# Altium PCB Deneigus.PcbDoc
Units mil, origin at the board's own origin, x right, y up, seen from the top; angles counter-clockwise.
Board outline 5000 x 5000 mil, 4 copper layers (Top, Ground Plane, Power Plane, Bottom), stack 67.086 mil thick; 118 components, 116 nets, 503 pads, 0 vias.
Unrouted connection lines stored in the file: 188.
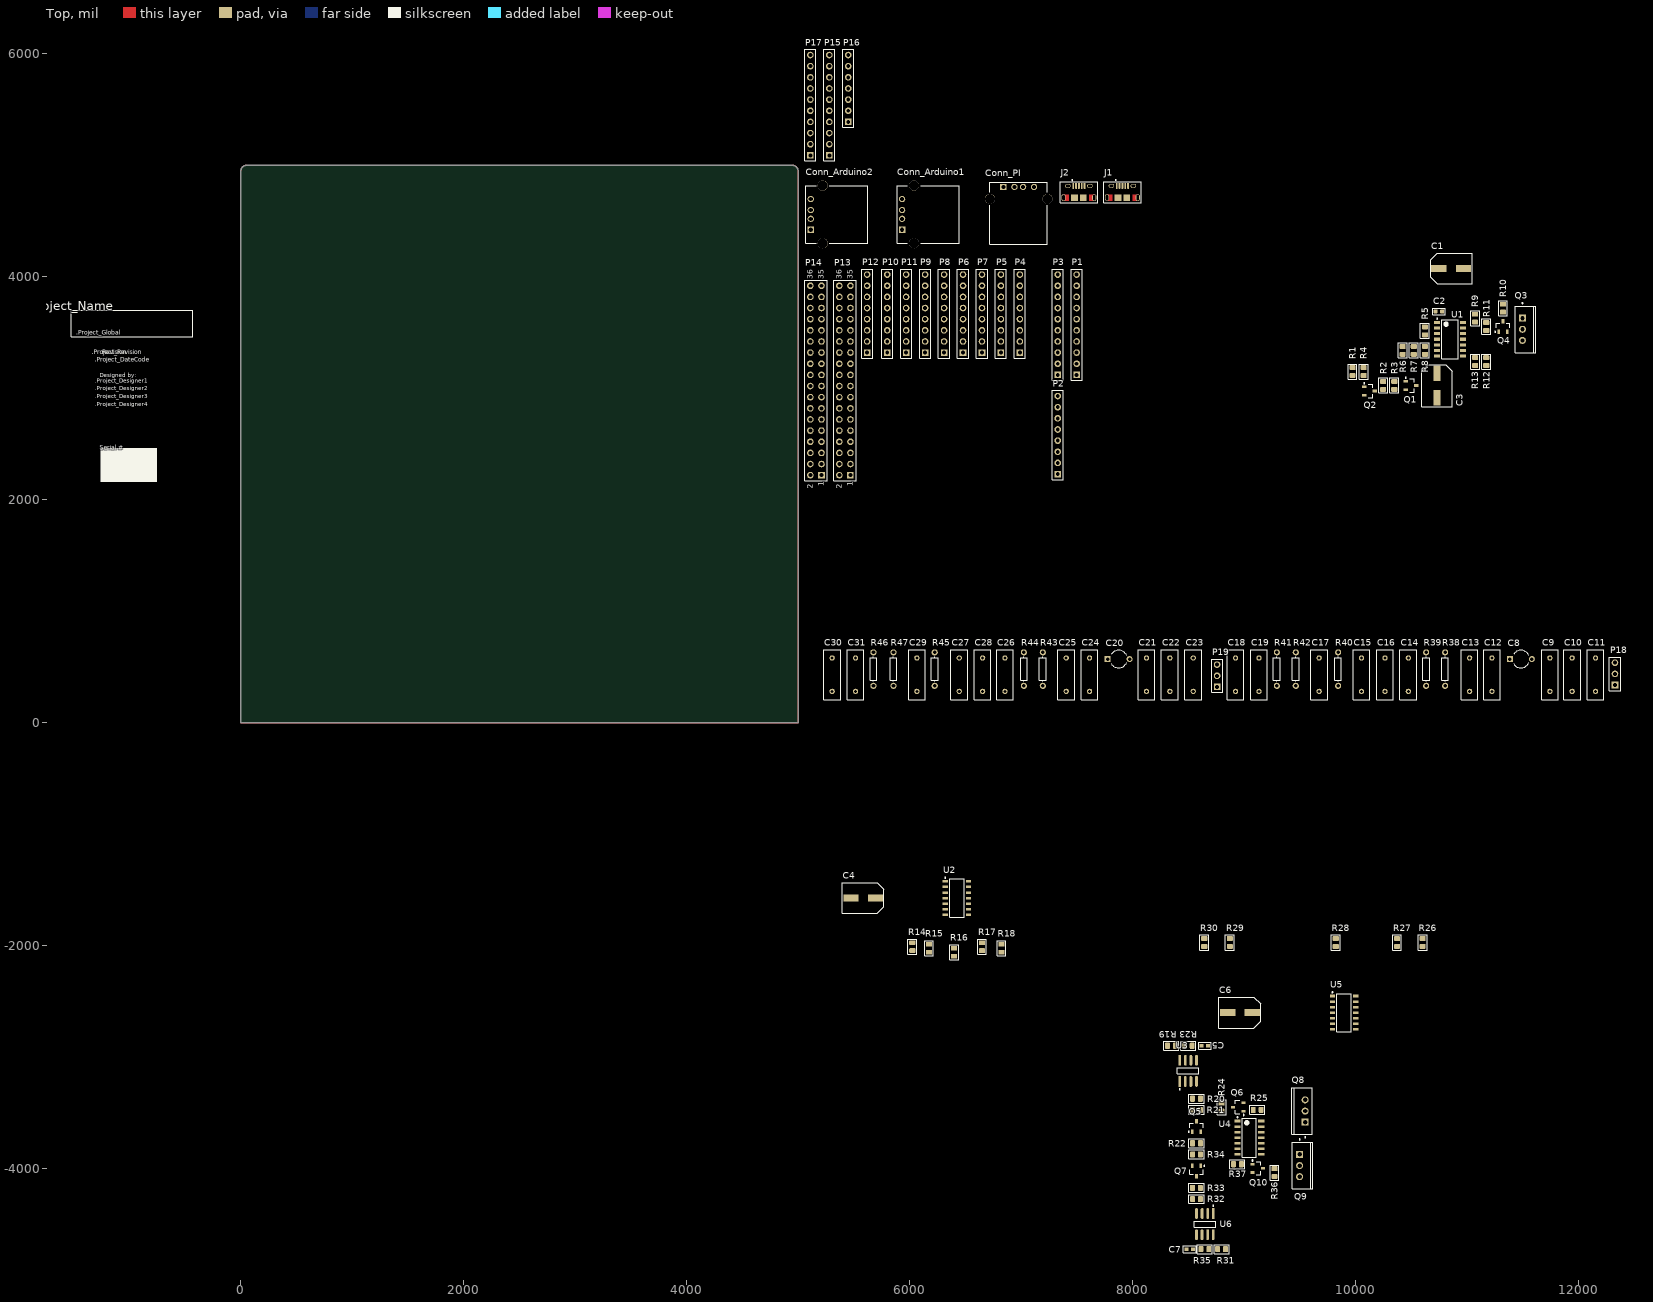
[diagram p0: Top view]
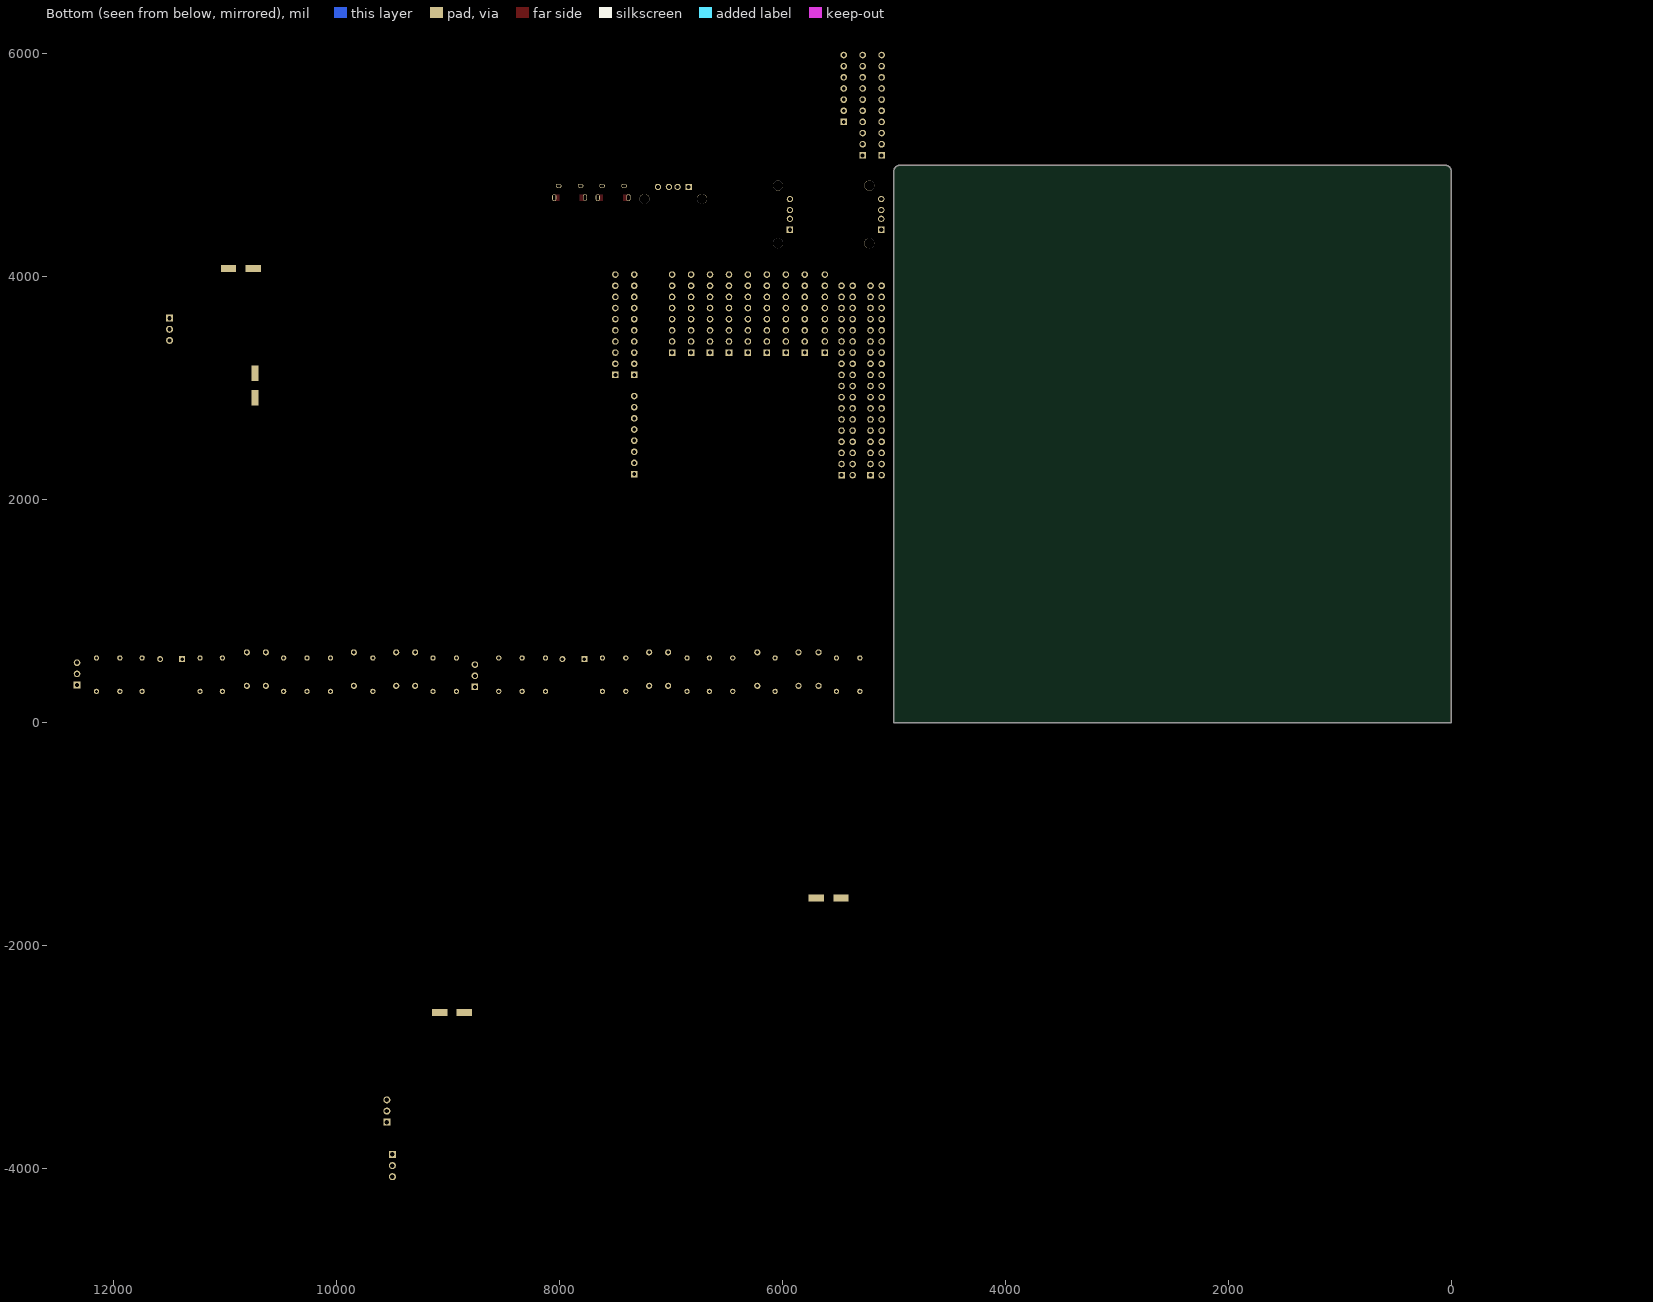
[diagram p1: Bottom view, seen from below]
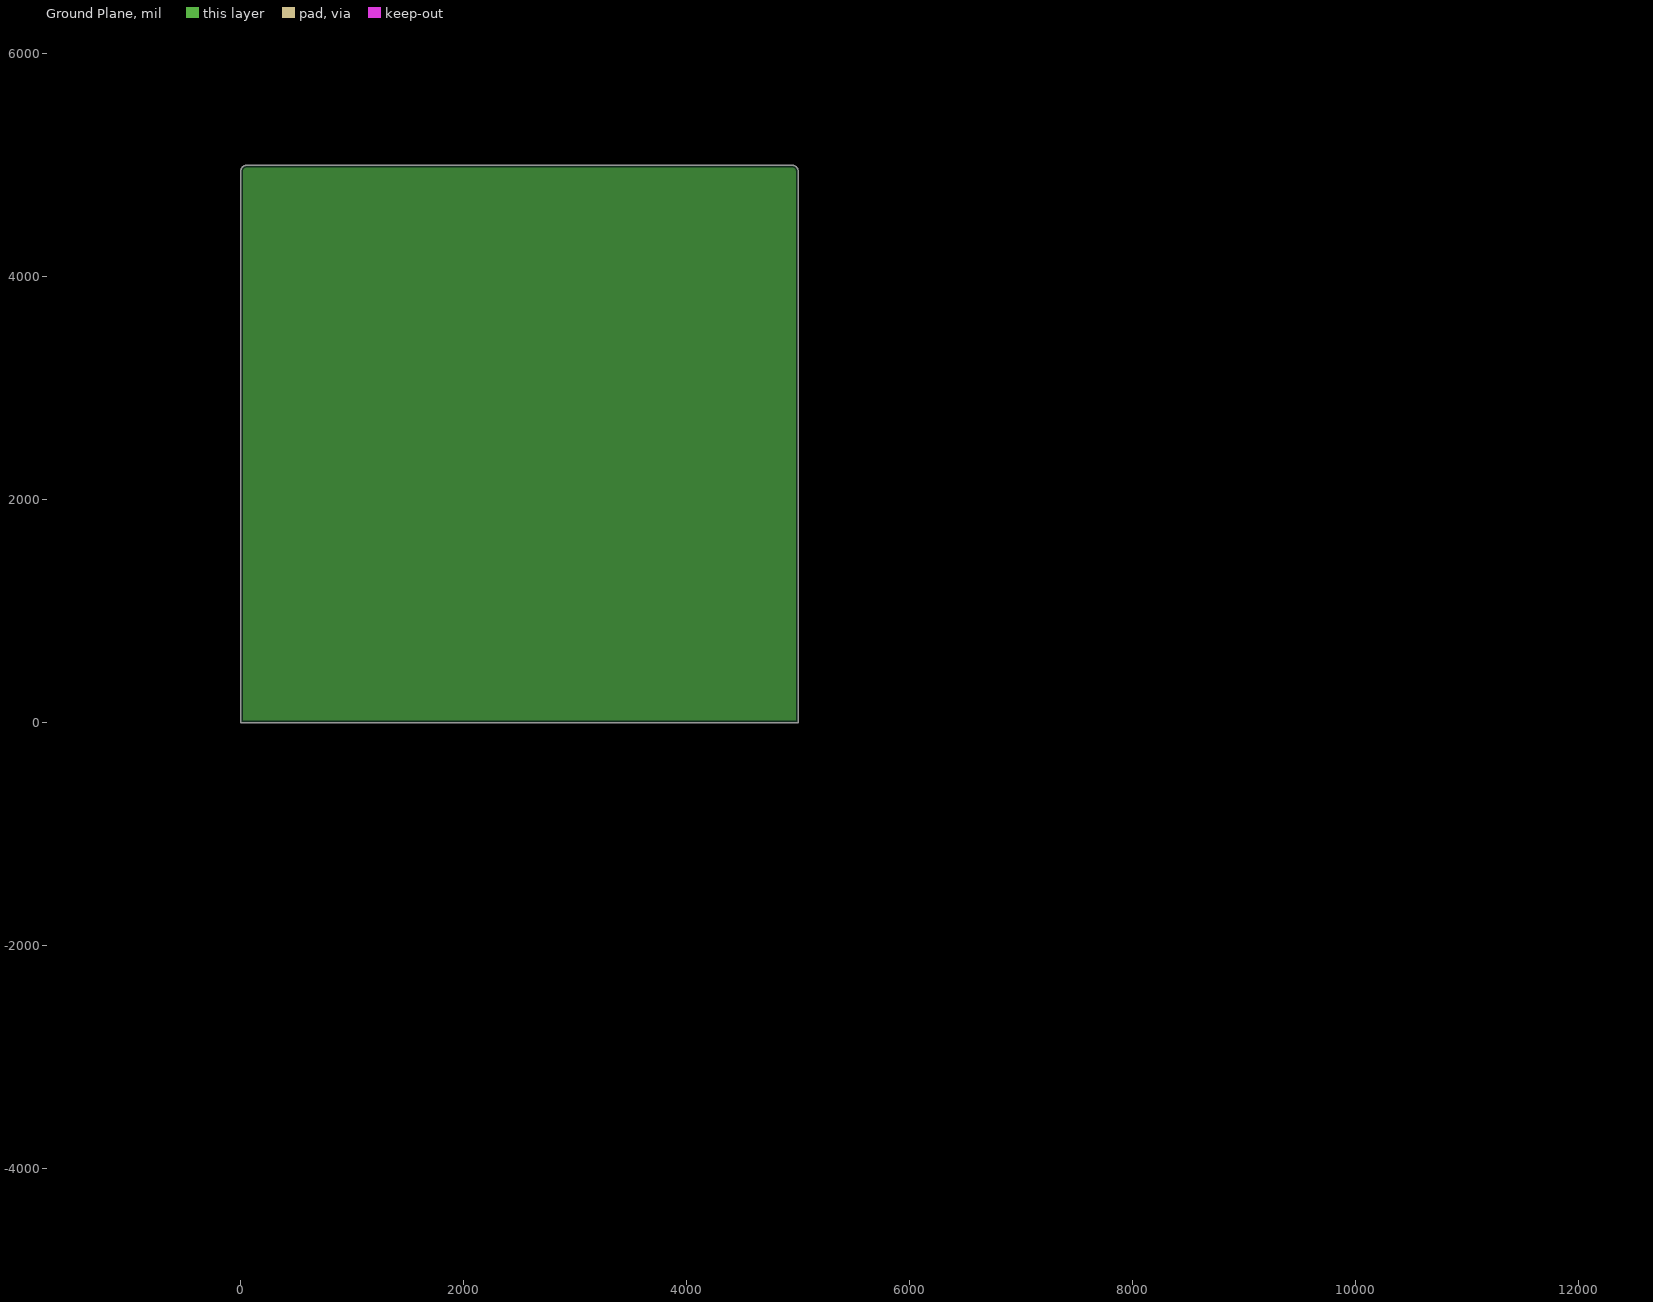
[diagram p2: Ground Plane, clearances drawn from the general rule]
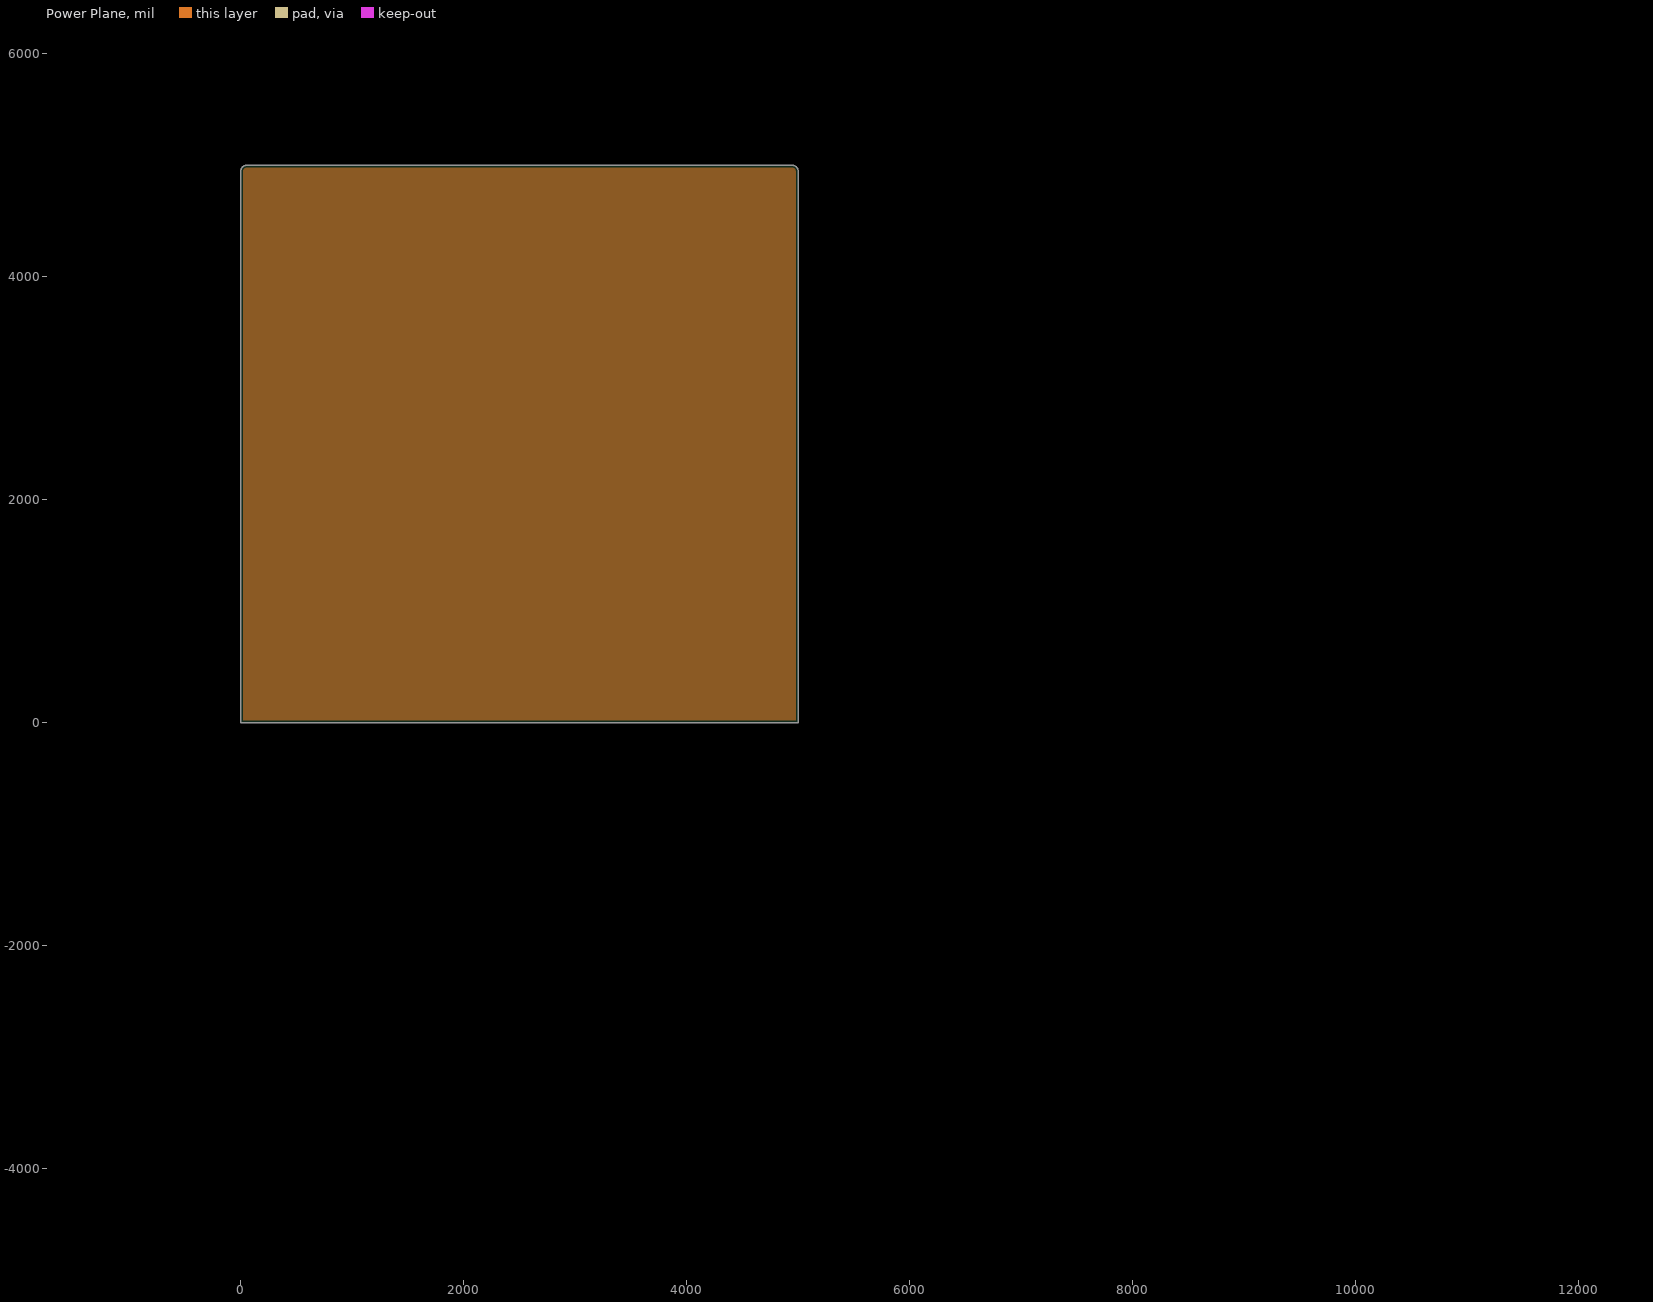
[diagram p3: Power Plane, clearances drawn from the general rule]

## Layer stack, top to bottom
Top Solder: solder mask 0.4, Solder Resist, Dk 3.5
Top: signal copper 1.378
Dielectric 1: prepreg 7.874, FR-4, Dk 4.2
Ground Plane: plane copper 0.669
Dielectric 3: core 47.244, Dk 4.2
Power Plane: plane copper 0.669
Dielectric 4: prepreg 7.874, Dk 4.2
Bottom: signal copper 1.378
Bottom Solder: solder mask 0.4, Solder Resist, Dk 3.5

## Board outline
0,0 5000,0 5000,4950 ccw(c4950,4950) 4950,5000 50,5000 ccw(c50,4950) 0,4950

## Design rules (kind name [scope] priority, off if disabled: settings)
Clearance [All] p1: gap=6 ignorepadtopadclearanceinfootprint=FALSE except(0: Arc-Hole Track-Hole SMDPad-Hole THPad-Hole Via-Hole Fill-Hole Poly-Hole Region-Hole Text-Hole)
ComponentClearance [All] p1: gap=4 collisioncheckmode=3 verticalgap=4 showdistances=FALSE
HoleSize [All] p1: absolutevalues=TRUE maxlimit=1000 minlimit=4 maxpercent=80.000 minpercent=20.000
HoleToHoleClearance [All] p1: gap=10 allowstackedmicrovias=FALSE
MinimumSolderMaskSliver [All] p1: minsoldermaskwidth=4
PlaneClearance [All] p1: clearance=6
PlaneConnect [All] p1: pad.planeconnectstyle=Relief pad.reliefexpansion=20 pad.reliefentries=4 pad.reliefconductorwidth=10 pad.reliefairgap=10 via.planeconnectstyle=Direct via.reliefexpansion=20 via.reliefentries=4 via.reliefconductorwidth=10 via.reliefairgap=10
PolygonConnect [All] p1: thpad.connectstyle=Relief thpad.reliefconductorwidth=10 thpad.reliefentries=4 thpad.polygonreliefangle="90 Angle" thpad.airgapwidth=10 smdpad.connectstyle=Direct smdpad.reliefconductorwidth=10 smdpad.reliefentries=4 smdpad.polygonreliefangle="90 Angle" smdpad.airgapwidth=10 via.connectstyle=Direct via.reliefconductorwidth=10 via.reliefentries=4 via.polygonreliefangle="90 Angle" via.airgapwidth=10
RoomDefinition Deneigus_Controle_Deplacement [InComponentClass('Deneigus_Controle_Deplacement')] p1: confinementstyle=ConfineIn formatcopy=TRUE lockcomponents=FALSE outline 4714.53,-5625 10894.53,-5625 10894.53,-875 4714.53,-875
RoomDefinition Deneigus_Servo [InComponentClass('Deneigus_Servo')] p2: confinementstyle=ConfineIn formatcopy=TRUE lockcomponents=FALSE outline 5215.97,190 12425.97,190 12425.97,770 5215.97,770
RoomDefinition Deneigus_Sensors [InComponentClass('Deneigus_Sensors')] p3: confinementstyle=ConfineIn formatcopy=TRUE lockcomponents=FALSE outline 5050,2080 7580,2080 7580,6150 5050,6150
RoomDefinition Deneigus_PI_Arduino [InComponentClass('Deneigus_PI_Arduino')] p4: confinementstyle=ConfineIn formatcopy=TRUE lockcomponents=FALSE outline 5050,2080 7580,2080 7580,6150 5050,6150
RoomDefinition Deneigus_Controle_Soufflante [InComponentClass('Deneigus_Controle_Soufflante')] p5: confinementstyle=ConfineIn formatcopy=TRUE lockcomponents=FALSE outline 9850,2700 11825,2700 11825,4400 9850,4400
RoutingVias [All] p1: holewidth=10 width=20 viastyle="Through Hole" minholewidth=10 minwidth=20 maxholewidth=10 maxwidth=20
SilkToSilkClearance [All] p1: silktosilkclearance=4
SilkToSolderMaskClearance [IsPad] p1: minsilkscreentomaskgap=2 clearancetoexposedcopper=FALSE
SolderMaskExpansion [All] p1: expansion=2 istentingtop=FALSE
Width [All] p1: maxlimit=1000 minlimit=4 preferedwidth=6
22 further rules are at their usual default settings.

## Classes and differential pairs
component class Deneigus_Servo: C8 C9 C10 C11 C12 C13 C14 C15 C16 C17 C18 C19 C20 C21 C22 C23 C24 C25 C26 C27 C28 C29 C30 C31 P18 P19 R38 R39 R40 R41 R42 R43 R44 R45 R46 R47 U?
component class Deneigus_Sensors: J? P15 P16 P17
component class Deneigus_POWER: Conn_Arduino1 Conn_Arduino2 Conn_PI J1 J2
component class Deneigus_PI_Arduino: J? P1 P2 P3 P4 P5 P6 P7 P8 P9 P10 P11 P12 P13 P14
component class Deneigus_Controle_Soufflante: C1 C2 C3 Q1 Q2 Q3 Q4 R1 R2 R3 R4 R5 R6 R7 R8 R9 R10 R11 R12 R13 U1
component class Deneigus_Controle_Deplacement: C4 C5 C6 C7 Q5 Q6 Q7 Q8 Q9 Q10 R14 R15 R16 R17 R18 R19 R20 R21 R22 R23 R24 R25 R26 R27 R28 R29 R30 R31 R32 R33 R34 R35 R36 R37 U2 U3 U5 U6

## Components (designator, comment, footprint, x,y, rotation, side; value= is the part's Value field where it differs from the comment)
C1 "CAP ALUM POLY 47UF 20% 16V SMD" 47uF 10970.47,4075 r180 top value=100µF
C2 "CAP - 0603" CAP_0603 10750,3689.5 r180 top value=100nF
C3 "CAP ALUM POLY 47UF 20% 16V SMD" 47uF 10733.86,2914.5 r90 top value=47µF
C4 "CAP ALUM POLY 47UF 20% 16V SMD" 47uF 5475,-1575 r0 top value=47µF
C5 "CAP - 0603" CAP_0603 8650,-2900 r180 top value=100nF
C6 "CAP ALUM POLY 47UF 20% 16V SMD" 47uF 8854.53,-2603.23 r0 top value=47µF
C7 "CAP - 0603" CAP_0603 8514.5,-4725 r0 top value=100nF
C8 "Cap2" CAPR5-4X5 11485.97,570 r0 top value=3300µF
C9 "Cap" RAD-0.3 11745.97,430 r90 top value=330µF
C10 "Cap" RAD-0.3 11945.97,430 r90 top value=?F
C11 "Cap" RAD-0.3 12155.97,430 r90 top value=?F
C12 "Cap" RAD-0.3 11225.97,430 r90 top value=330nF
C13 "Cap" RAD-0.3 11025.97,430 r90 top value=2.2µF
C14 "Cap" RAD-0.3 10475.97,430 r90 top value=2.2nF
C15 "Cap" RAD-0.3 10055.97,430 r90 top value=22nF
C16 "Cap" RAD-0.3 10265.97,430 r90 top value=22nF
C17 "Cap" RAD-0.3 9675.97,430 r90 top value=2.2µF
C18 "Cap" RAD-0.3 8925.97,430 r90 top value=2.2µF
C19 "Cap" RAD-0.3 9135.97,430 r90 top value=2.2µF
C20 "Cap2" CAPR5-4X5 7875.97,570 r0 top value=3300µF
C21 "Cap" RAD-0.3 8125.97,430 r90 top value=330µF
C22 "Cap" RAD-0.3 8335.97,430 r90 top value=?F
C23 "Cap" RAD-0.3 8545.97,430 r90 top value=?F
C24 "Cap" RAD-0.3 7615.97,430 r90 top value=330nF
C25 "Cap" RAD-0.3 7405.97,430 r90 top value=2.2µF
C26 "Cap" RAD-0.3 6855.97,430 r90 top value=2.2nF
C27 "Cap" RAD-0.3 6445.97,430 r90 top value=22nF
C28 "Cap" RAD-0.3 6655.97,430 r90 top value=22nF
C29 "Cap" RAD-0.3 6065.97,430 r90 top value=2.2µF
C30 "Cap" RAD-0.3 5305.97,430 r90 top value=2.2µF
C31 "Cap" RAD-0.3 5515.97,430 r90 top value=2.2µF
Conn_Arduino1 "USB-A1HSW6" OST_USB-A1HSW6 6190,4560 r90 top
Conn_Arduino2 "USB-A1HSW6" OST_USB-A1HSW6 5370,4560 r90 top
Conn_PI "USB-A1HSW6" OST_USB-A1HSW6 6980,4550 r0 top
J1 "10118194-0001LF" CON_USB_10118194-0001LF 7910,4710 r0 top value="USB - Micro B"
J2 "10118194-0001LF" CON_USB_10118194-0001LF 7520,4710 r0 top value="USB - Micro B"
P1 "Header 10" HDR1X10 7500,3120 r90 top
P2 "Header 8" HDR1X8 7330,2230 r90 top
P3 "Header 10" HDR1X10 7330,3120 r90 top
P4 "Header 8" HDR1X8 6990,3320 r90 top
P5 "Header 8" HDR1X8 6820,3320 r90 top
P6 "Header 8" HDR1X8 6480,3320 r90 top
P7 "Header 8" HDR1X8 6650,3320 r90 top
P8 "Header 8" HDR1X8 6310,3320 r90 top
P9 "Header 8" HDR1X8 6140,3320 r90 top
P10 "Header 8" HDR1X8 5800,3320 r90 top
P11 "Header 8" HDR1X8 5970,3320 r90 top
P12 "Header 8" HDR1X8 5620,3320 r90 top
P13 "Header 18X2" HDR2X18 5470,2220 r90 top
P14 "Header 18X2" HDR2X18 5210,2220 r90 top
P15 "Header 10" HDR1X10 5280,5090 r90 top
P16 "Header 7" HDR1X7 5450,5390 r90 top
P17 "Header 10" HDR1X10 5110,5090 r90 top
P18 "Header 3" HDR1X3 12330,337.26 r90 top
P19 "Header 3" HDR1X3 8760,320 r90 top
Q1 "TRANS PNP 40V 0.2A SOT23" SOT-23 10500,3025 r0 top
Q2 "TRANS NPN 40V 0.2A SOT23" SOT-23 10127.24,2975 r0 top
Q3 "IRF520NPBF" INTR-TO-220AB-3 11500,3529 r0 top
Q4 "TRANS NPN 40V 0.2A SOT23" SOT-23 11325,3554 r90 top
Q5 "TRANS NPN 40V 0.2A SOT23" SOT-23 8575,-3625 r90 top
Q6 "TRANS NPN 40V 0.2A SOT23" SOT-23 8950,-3450 r180 top
Q7 "TRANS NPN 40V 0.2A SOT23" SOT-23 8575,-4025 r270 top
Q8 "IRF520NPBF" INTR-TO-220AB-3 9550,-3485.5 r180 top
Q9 "IRF520NPBF" INTR-TO-220AB-3 9500,-3975 r0 top
Q10 "TRANS NPN 40V 0.2A SOT23" SOT-23 9125,-4000 r0 top
R1 "Res1" RES_0805 9975,3150 r90 top value=10K
R2 "Res1" RES_0805 10250,3025 r270 top value=1K
R3 "Res1" RES_0805 10350,3025 r90 top value=1K
R4 "Res1" RES_0805 10075,3150 r270 top value=1K
R5 "Res1" RES_0805 10625,3514.5 r270 top value=1K
R6 "Res1" RES_0805 10425,3339.5 r270 top value=15K
R7 "Res1" RES_0805 10525,3339.5 r270 top value=10K
R8 "Res1" RES_0805 10625,3339.5 r90 top value=10K
R9 "Res1" RES_0805 11075,3629 r90 top value=1K
R10 "Res1" RES_0805 11325,3718.5 r90 top value=10K
R11 "Res1" RES_0805 11175,3554 r270 top value=10K
R12 "Res1" RES_0805 11175,3239.5 r270 top value=30k
R13 "Res1" RES_0805 11075,3239.5 r90 top value=10k
R14 "Res1" RES_0805 6025,-2010.5 r90 top value=15K
R15 "Res1" RES_0805 6175,-2025 r90 top value=10K
R16 "Res1" RES_0805 6400,-2060.5 r90 top value=15K
R17 "Res1" RES_0805 6650,-2010.5 r90 top value=9K
R18 "Res1" RES_0805 6825,-2025 r90 top value=1K
R19 "Res1" RES_0805 8350,-2900 r180 top value=3K
R20 "Res1" RES_0805 8575,-3375 r0 top value=1k
R21 "Res1" RES_0805 8575,-3475 r0 top value=1k
R22 "Res1" RES_0805 8575,-3775 r0 top value=1k
R23 "Res1" RES_0805 8500,-2900 r180 top value=3K
R24 "Res1" RES_0805 8800,-3450 r90 top value=1k
R25 "Res1" RES_0805 9119.49,-3475 r180 top value=220
R26 "Res1" RES_0805 10604.53,-1973.23 r90 top value=10K
R27 "Res1" RES_0805 10374.53,-1973.23 r90 top value=15K
R28 "Res1" RES_0805 9824.53,-1973.23 r90 top value=15K
R29 "Res1" RES_0805 8874.53,-1973.23 r90 top value=9K
R30 "Res1" RES_0805 8644.53,-1973.23 r90 top value=1K
R31 "Res1" RES_0805 8800,-4725 r0 top value=3K
R32 "Res1" RES_0805 8575,-4275 r180 top value=1k
R33 "Res1" RES_0805 8575,-4175 r180 top value=1k
R34 "Res1" RES_0805 8575,-3875 r0 top value=1k
R35 "Res1" RES_0805 8650,-4725 r0 top value=3K
R36 "Res1" RES_0805 9275,-4037.4 r270 top value=1k
R37 "Res1" RES_0805 8942.72,-3962.6 r0 top value=220
R38 "Res1" AXIAL-0.3 10805.97,480 r90 top value=16k
R39 "Res1" AXIAL-0.3 10635.97,480 r90 top value=4.5k
R40 "Res1" AXIAL-0.3 9845.97,480 r90 top value=30k
R41 "Res1" AXIAL-0.3 9295.97,480 r90 top value=15k
R42 "Res1" AXIAL-0.3 9465.97,480 r90 top value=10k
R43 "Res1" AXIAL-0.3 7195.97,480 r90 top value=16k
R44 "Res1" AXIAL-0.3 7025.97,480 r90 top value=1.7k
R45 "Res1" AXIAL-0.3 6225.97,480 r90 top value=30k
R46 "Res1" AXIAL-0.3 5675.97,480 r90 top value=15k
R47 "Res1" AXIAL-0.3 5855.97,480 r90 top value=10k
U1 "LM339" SOP14 10850,3439.5 r0 top
U2 "LM324DR2G" ONSC-SOIC-14-751A-03_V 6425,-1575 r0 top
U3 "NE555DR" FP-D0008A-IPC_A 8500,-3125 r90 top
U4 "IC FF JK TYPE DUAL 1BIT 14SOIC" SOIC127P600X175-14N 9050,-3725 r0 top
U5 "LM324DR2G" ONSC-SOIC-14-751A-03_V 9899.8,-2603.23 r0 top
U6 "NE555DR" FP-D0008A-IPC_A 8650,-4500 r270 top

## Footprints (in the part's own frame and the unit in brackets; to place one, negate y for a bottom-side part, rotate by r counter-clockwise, add the part's x,y. Pads: shape width x height; smd on the part's side, far side on the other; paste and mask are expansions set on the pad)
47uF [mm] "CAP ALUM POLY 47UF 20% 16V SMD"
  rect 3.5x1.6 all layers, no hole: 1(5.6,0) 2(0,0)
  silkscreen extent -2,-3.5 7.5,3.5
AXIAL-0.3 [mm] "Axial Device, Thru-Hole; 2 Leads; 0.3 in Pin Spacing"
  round 1.4 hole 0.85: 1(-3.81,0) 2(3.81,0)
  silkscreen extent -2.77,-0.76 2.77,0.76
CAP_0603 [mil]
  rrect35% 35x34 smd: 1(-29.5,0) 2(29.5,0)
  silkscreen extent -57,-30 57,30, body extent -32,-16 31,16, height 35
CAPR5-4X5 [mm] "Capacitor; 2 Leads"
  rect 1.35x1.35 hole 0.8: 1(-2.5,0)
  round 1.35 hole 0.8: 2(2.5,0)
  silkscreen extent -1.69,-2 1.82,2
CON_USB_10118194-0001LF [mm]
  rrect50% 0.4x1.35 smd paste+0 mask+0.05: 1(-1.3,2.7) 2(-0.65,2.7) 3(0,2.7) 4(0.65,2.7) 5(1.3,2.7)
  rrect100% 1.25x0.95 hole 0.55 slot 0.85 at 0 deg mask+0.05: 6(2.5,2.7) 11(-2.5,2.7)
  rrect100% 0.95x1.55 hole 0.5 slot 1.15 at 90 deg mask+0.05: 7(3.5,0) 10(-3.5,0)
  rect 1.5x1.55 smd paste+0 mask+0.05: 8(1,0) 9(-1,0)
  Top region: 2.3,-0.775 3.5,-0.775 3.5,0.775 2.3,0.775
  Top region: -2.3,0.775 -3.5,0.775 -3.5,-0.775 -2.3,-0.775
  silkscreen extent -4.3,-1.2 4.3,4.11, body extent -4.03,-2.69 4.02,2.89, height 2.72
FP-D0008A-IPC_A [mil]
  rect 97.21x24.49 smd paste+0 mask+0: 1(-95.02,75)
  rrect100% 97.21x24.49 smd paste+0 mask+0: 2(-95.02,25) 3(-95.02,-25) 4(-95.02,-75) 5(95.02,-75) 6(95.02,-25) 7(95.02,25) 8(95.02,75)
  silkscreen extent -170,-97 27,97, body extent -163,-116 163,116, height 10
HDR1X3 [mm] "Connector; Header; 3 Position"
  rect 1.5x1.5 hole 0.9: 1(0,0)
  round 1.5 hole 0.9: 2(2.54,0) 3(5.08,0)
  silkscreen extent -1.27,-1.27 6.35,1.27
HDR1X7 [mm] "Connector; Header; 7 Position"
  rect 1.5x1.5 hole 0.9: 1(0,0)
  round 1.5 hole 0.9: 2(2.54,0) 3(5.08,0) 4(7.62,0) 5(10.16,0) 6(12.7,0) 7(15.24,0)
  silkscreen extent -1.27,-1.27 16.51,1.27
HDR1X8 [mm] "Connector; Header; 8 Position"
  rect 1.5x1.5 hole 0.9: 1(0,0)
  round 1.5 hole 0.9: 2(2.54,0) 3(5.08,0) 4(7.62,0) 5(10.16,0) 6(12.7,0) 7(15.24,0) 8(17.78,0)
  silkscreen extent -1.27,-1.27 19.05,1.27
HDR1X10 [mm] "Connector; Header; 10 Position"
  rect 1.5x1.5 hole 0.9: 1(0,0)
  round 1.5 hole 0.9: 2(2.54,0) 3(5.08,0) 4(7.62,0) 5(10.16,0) 6(12.7,0) 7(15.24,0) 8(17.78,0) 9(20.32,0) 10(22.86,0)
  silkscreen extent -1.27,-1.27 24.13,1.27
HDR2X18 [mm] "Connector; Header; 18x2 Position"
  rect 1.5x1.5 hole 0.9: 1(0,0)
  round 1.5 hole 0.9: 2(0,2.54) 3(2.54,0) 4(2.54,2.54) 5(5.08,0) 6(5.08,2.54) 7(7.62,0) 8(7.62,2.54) 9(10.16,0) 10(10.16,2.54) 11(12.7,0) 12(12.7,2.54) 13(15.24,0) 14(15.24,2.54) 15(17.78,0) 16(17.78,2.54) 17(20.32,0) 18(20.32,2.54) 19(22.86,0) 20(22.86,2.54) 21(25.4,0) 22(25.4,2.54) 23(27.94,0) 24(27.94,2.54) 25(30.48,0) 26(30.48,2.54) 27(33.02,0) 28(33.02,2.54) 29(35.56,0) 30(35.56,2.54) 31(38.1,0) 32(38.1,2.54) 33(40.64,0) 34(40.64,2.54) 35(43.18,0) 36(43.18,2.54)
  silkscreen extent -1.27,-1.27 44.45,3.81
INTR-TO-220AB-3 [mm] "FM, 3-Leads, Body 10.55x4.7mm, Pitch 2.54mm"
  rect 1.6x1.6 hole 1: 1(0,2.54)
  round 1.6 hole 1: 2(0,0) 3(0,-2.54)
  silkscreen extent -1.67,-5.3 3.03,6.07, body extent -1.67,-5.28 3.03,5.28, height 19.3
ONSC-SOIC-14-751A-03_V [mm] "SOIC, 14-Leads, Body 8.75x4mm, Pitch 1.27mm"
  rect 1.18x0.58 smd: 1(-2.66,3.81) 2(-2.66,2.54) 3(-2.66,1.27) 4(-2.66,0) 5(-2.66,-1.27) 6(-2.66,-2.54) 7(-2.66,-3.81) 8(2.66,-3.81) 9(2.66,-2.54) 10(2.66,-1.27) 11(2.66,0) 12(2.66,1.27) 13(2.66,2.54) 14(2.66,3.81)
  silkscreen extent -2.78,-4.38 1.67,4.77, body extent -2,-4.38 2,4.38, height 1.75
OST_USB-A1HSW6 [mm]
  rect 1.428x1.428 hole 0.92: 1(-3.5,6.51)
  round 1.428 hole 0.92: 2(-1,6.51) 3(1,6.51) 4(3.5,6.51)
  round 2.3 hole 2.3 unplated: ""(-6.57,3.8) ""(6.57,3.8)
  silkscreen extent -6.55,-6.5 6.55,7.6
RAD-0.3 [mm] "Radial Cap, Thru-Hole; 2 Leads; 0.3 in Pin Spacing"
  round 1.2 hole 0.7: 1(-3.81,0) 2(3.81,0)
  silkscreen extent -5.71,-1.91 5.71,1.91
RES_0805 [mil]
  rrect37% 43x55 smd: 1(-35.5,0) 2(35.5,0)
  silkscreen extent -68,-40 68,40, body extent -45,-27 45,27, height 30
SOIC127P600X175-14N [mm] "SOIC, 14-Leads, Body 8.65x3.90mm, Pitch 1.27mm, IPC Medium Density"
  rect 1.45x0.6 smd: 1(-2.725,3.81) 2(-2.725,2.54) 3(-2.725,1.27) 4(-2.725,0) 5(-2.725,-1.27) 6(-2.725,-2.54) 7(-2.725,-3.81) 8(2.725,-3.81) 9(2.725,-2.54) 10(2.725,-1.27) 11(2.725,0) 12(2.725,1.27) 13(2.725,2.54) 14(2.725,3.81)
  silkscreen extent -2.85,-4.4 1.6,4.78, body extent -3,-4.4 3,4.4, height 1.75
SOP14 [mm] "SOP14 pour LM339"
  rect 1.3x0.7 smd: 1(-2.95,3.81) 2(-2.95,2.54) 3(-2.95,1.27) 4(-2.95,0) 5(-2.95,-1.27) 6(-2.95,-2.54) 7(-2.95,-3.81) 8(2.95,-3.81) 9(2.95,-2.54) 10(2.95,-1.27) 11(2.95,0) 12(2.95,1.27) 13(2.95,2.54) 14(2.95,3.81)
  silkscreen extent -3.07,-4.45 1.9,4.83, body extent -3.1,-4.45 3.1,4.45, height 1.5
SOT-23 [mm] "SOT23, 3-Leads, Body 2.90x2.45mm, Pitch 0.95mm, IPC Medium Density"
  rect 1x0.6 smd: 1(-1.2,0.95) 2(-1.2,-0.95) 3(1.2,0)
  silkscreen extent -1.32,-1.5 0.7,1.92, body extent -0.7,-1.5 0.7,1.5, height 1.1

## Part data
C1: library part "47µF SMD", Mfg Part Number=875105344010, Supplier Part Number 1=732-6425-2-ND, HelpURL=https://www.we-online.de/katalog/datasheet/875105344010.pdf, Mfg="Würth Elektronik", Supplier 1=Digikey
C2 C5 C7: Package=0603, Voltage=50V, CreatedBy="Jonathan Bouchard", Precision=10%
C3 C4 C6: library part "47µF SMD", Mfg Part Number=875105344006, Supplier Part Number 1=732-6421-2-ND, HelpURL=https://www.we-online.de/katalog/datasheet/875105344006.pdf, Mfg="Würth Elektronik", Supplier 1=Digikey
C8 C9 C10 C11 C12 C13 C14 C15 C16 C17 C18 C19 C20 C21 C22 C23 C24 C25 C26 C27 C28 C29 C30 C31: "Capacitor", Publisher="Altium Limited"
  C8 C20: PackageDescription="Capacitor; 2 Leads", PackageReference=CAPR5-4X5, Published=23-Sep-2002
  C9 C10 C11 C12 C13 C14 C15 C16 C17 C18 C19 C21 C22 C23 C24 C25 C26 C27 C28 C29 C30 C31: LatestRevisionDate=17-Jul-2002, LatestRevisionNote="Re-released for DXP Platform.", PackageDescription="Radial Cap, Thru-Hole; 2 Leads; 0.3 in Pin Spacing", PackageReference=RAD-0.3, Published=8-Jun-2000
Conn_Arduino1 Conn_Arduino2 Conn_PI: "USB-A _USB TYPE-A_  Receptacle Connector 4 Position Through Hole, Right Angle", Package=None, Availability=Unavailable, MF="On Shore", MP=USB-A1HSW6, Price=None, SnapEDA_Link=https://www.snapeda.com/parts/USB-A1HSW6/On%20Shore%20Technology%20Inc./view-part/13110/?ref=snap
J1 J2: library part CON_USB_10118194-0001LF, "CON - USB MICRO B RECPT SMT R/A - 4PIN", Current Rating=1.8A, Manufacturer #1="Amphenol FCI", Package=5-SMD, Supplier Part Number 1=609-4618-1-ND, Temperature="-30°C ~ 80°C", Voltage Rating=100VAC, Assembly Type=SMD, CreatedBy/Date="Arnaud Samson - 09/07/18", Cryo=UNKNOWN, GRAMS Lib Spec=2.8, HelpURL=https://cdn.amphenol-icc.com/media/wysiwyg/files/drawing/10118194.pdf, Magnetic Material=YES, Part Number #1=10118194-0001LF, Polarized=YES, Supplier 1=Digi-Key, VerifiedBy="Jonathan Bouchard 2018-07-12"
P1 P3 P15 P17: "Header, 10-Pin", LatestRevisionDate=17-Jul-2002, LatestRevisionNote="Re-released for DXP Platform.", Publisher="Altium Limited"
P2 P4 P5 P6 P7 P8 P9 P10 P11 P12: "Header, 8-Pin", LatestRevisionDate=17-Jul-2002, LatestRevisionNote="Re-released for DXP Platform.", Publisher="Altium Limited"
P13 P14: "Header, 18-Pin, Dual row", LatestRevisionDate=17-Jul-2002, LatestRevisionNote="Re-released for DXP Platform.", Publisher="Altium Limited"
P16: "Header, 7-Pin", LatestRevisionDate=17-Jul-2002, LatestRevisionNote="Re-released for DXP Platform.", Publisher="Altium Limited"
P18 P19: "Header, 3-Pin", LatestRevisionDate=17-Jul-2002, LatestRevisionNote="Re-released for DXP Platform.", Publisher="Altium Limited"
Q1: library part "PNP 3906 SMD", "Trans GP BJT PNP 40V 0.2A 3-Pin SOT-23 T/R", Case/Package=SOT-23, Collector Base Voltage (VCBO)=40V, Collector Emitter Saturation Voltage=-250mV, Collector-emitter Voltage-Max=400mV, Current Rating=-2A, Emitter Base Voltage (VEBO)=5V, Frequency=250MHz, Manufacturer=MCC, Manufacturer Part Number=MMBT3906-TP, Max Collector Current=200mA, Max Operating Temperature=150°C, Max Power Dissipation=300mW, Min Operating Temperature=-55°C, Package Quantity=1, Supplier Part Number 1=MMBT3906-TPCT-ND, Voltage Rating (DC)=-40V, Category=BJTs, Collector Emitter Breakdown Voltage=40V, Collector Emitter Voltage (VCEO)=40V, ComponentLink1Description=https://datasheet.ciiva.com/6362/mmbt3906sot-23-6362513.pdf?src-supplier=Digi-Key, ComponentLink1URL=https://datasheet.ciiva.com/6362/mmbt3906sot-23-6362513.pdf?src-supplier=Digi-Key, ComponentLink2Description=https://datasheet.ciiva.com/15200/getdatasheetpartid-321202-15200524.pdf?src-supplier=Verical, ComponentLink2URL=https://datasheet.ciiva.com/15200/getdatasheetpartid-321202-15200524.pdf?src-supplier=Verical, Element Configuration=Single, Gain Bandwidth Product=250MHz, Height=1.12mm, hFE Min=60, Lead Free="Lead Free", Length=3.04mm, Max Breakdown Voltage=40V, Max Frequency=250MHz, Mount="Surface Mount", Number of Elements=1, Number of Pins=3, Packaging="Tape and Reel", Polarity=PNP, Power Dissipation=300mW, Pricing 1="1=0.14000, 10=0.09700, 25=0.09320, 100=0.05250, 500=0.04122, 1000=0.02862 (USD)", Radiation Hardening=No, RoHS=Yes, Series=-, Stock 1=96763, Supplier 1=Digi-Key, Transition Frequency=250MHz, Width=1.4mm
Q2 Q4 Q5 Q6 Q7 Q10: library part "NPN 3904 SMD", "Transistor: 200mA 200mW NPN General-Purpose Amplifier, SOT-23, 7IN. Reel", Case/Package=SOT-23, Collector Base Voltage (VCBO)=60V, Collector Emitter Breakdown Voltage=40V, Collector Emitter Saturation Voltage=300mV, Current Rating=100mA, Emitter Base Voltage (VEBO)=6V, Frequency=300MHz, Manufacturer=MCC, Manufacturer Part Number=MMBT3904-TP, Max Collector Current=200mA, Max Operating Temperature=150°C, Max Power Dissipation=350mW, Min Operating Temperature=-55°C, Package Quantity=1, Category=BJTs, Collector Emitter Voltage (VCEO)=40V, Collector-emitter Voltage-Max=300mV, ComponentLink1Description=https://datasheet.ciiva.com/972/mmbt3904sot-23-972515.pdf?src-supplier=Digi-Key, ComponentLink1URL=https://datasheet.ciiva.com/972/mmbt3904sot-23-972515.pdf?src-supplier=Digi-Key, ComponentLink2Description=https://datasheet.ciiva.com/16291/mmbt3904sot-23-37005-16291911.pdf?src-supplier=Mouser, ComponentLink2URL=https://datasheet.ciiva.com/16291/mmbt3904sot-23-37005-16291911.pdf?src-supplier=Mouser, ComponentLink3Description=https://datasheet.ciiva.com/15139/getdatasheetpartid-251950-15139820.pdf?src-supplier=Verical, ComponentLink3URL=https://datasheet.ciiva.com/15139/getdatasheetpartid-251950-15139820.pdf?src-supplier=Verical, ComponentLink4Description=https://datasheet.ciiva.com/972/mmbt3904sot-23-972516.pdf?src-supplier=Digi-Key, ComponentLink4URL=https://datasheet.ciiva.com/972/mmbt3904sot-23-972516.pdf?src-supplier=Digi-Key, ComponentLink5Description=https://datasheet.ciiva.com/16742/mmbt3904tsot-523-16742101.pdf?src-supplier=Future+Electronics, ComponentLink5URL=https://datasheet.ciiva.com/16742/mmbt3904tsot-523-16742101.pdf?src-supplier=Future+Electronics, ComponentLink6Description=https://datasheet.ciiva.com/14546/70055699-14546053.pdf?src-supplier=Allied+Electronics, ComponentLink6URL=https://datasheet.ciiva.com/14546/70055699-14546053.pdf?src-supplier=Allied+Electronics, Element Configuration=Single, Gain Bandwidth Product=300MHz, Height=1.12mm, hFE Min=40, Lead Free="Lead Free", Length=3.04mm, Max Breakdown Voltage=40V, Max Frequency=300MHz, Mount="Surface Mount", Number of Elements=1, Number of Pins=3, Packaging="Tape and Reel", Polarity=NPN, Power Dissipation=350mW, Pricing 1="1=0.10000, 10=0.08100, 25=0.07680, 100=0.04400, 500=0.02706, 1000=0.01844 (USD)", Radiation Hardening=No, RoHS=Yes, RoHS Compliant=Yes, Series=-, Stock 1=949449, Supplier 1=Digi-Key, Transition Frequency=300MHz, Voltage Rating (DC)=40V, Width=1.4mm
Q3: library part CMP-013-00017-4, "HEXFET(R) Power MOSFET, 100 V, 9.7 A, 0.2 Ohm, -55 to 175 degC, 3-Pin FM (TO-220AB), RoHS, Tube", Case/Package=TO-220-3, Continuous Drain Current (ID)=202A, Current Rating=162A, Drain to Source Breakdown Voltage=40V, Drain to Source Resistance=4mR, Gate to Source Voltage (Vgs)=20V, Input Capacitance=330pF, Manufacturer="International Rectifier", Manufacturer Part Number=IRF1404PBF, Max Operating Temperature=175°C, Max Power Dissipation=333W, Min Operating Temperature=-55°C, Nominal Dual Supply Voltage=100V, Package Description="3-Pin Flange Mount, Body 4.445 x 10.415 mm, Pitch 2.54 mm", Package Quantity=50, Package Reference=TO-220AB, Power=48W, Supplier Part Number 1=63J7187, Threshold Voltage=4V, Category=MOSFETs, ComponentLink1Description=https://datasheet.ciiva.com/7935/irf1404-7935436.pdf?src-supplier=Element14, ComponentLink1URL=https://datasheet.ciiva.com/7935/irf1404-7935436.pdf?src-supplier=Element14, ComponentLink2Description=https://datasheet.ciiva.com/19479/1559551-19479743.pdf?src-supplier=Jameco, ComponentLink2URL=https://datasheet.ciiva.com/19479/1559551-19479743.pdf?src-supplier=Jameco, ComponentLink3Description=https://datasheet.ciiva.com/17323/irf1404pbf-17323123.pdf?src-supplier=Avnet+Europe, ComponentLink3URL=https://datasheet.ciiva.com/17323/irf1404pbf-17323123.pdf?src-supplier=Avnet+Europe, ComponentLink4Description=https://datasheet.ciiva.com/939/irf1404pbf-939787.pdf?src-supplier=Digi-Key, ComponentLink4URL=https://datasheet.ciiva.com/939/irf1404pbf-939787.pdf?src-supplier=Digi-Key, ComponentLink5Description=https://datasheet.ciiva.com/16378/irf1404pbf-16378907.pdf?src-supplier=Future+Electronics, ComponentLink5URL=https://datasheet.ciiva.com/16378/irf1404pbf-16378907.pdf?src-supplier=Future+Electronics, Datasheet URL=http://www.infineon.com/dgdl/irf520npbf.pdf?fileId=5546d462533600a4015355e340711985, Datasheet Version=Nov-03, Drain to Source Voltage (Vdss)=40V, Drain-source On Resistance-Max=4mR, Dual Supply Voltage=40V, Element Configuration=Single, Elements=1, Fall Time=33ns, Height=8.77mm, Lead Free="Lead Free", Lead Pitch=2.54mm, Length=10.67mm, Mount="Through Hole", Mounting Technology=TH, Nominal Vgs=4V, Number of Elements=1, Number of Pins=3, On-State Resistance=4mR, Packaging=Rail/Tube, Pins=3, Power Dissipation=333W, Pricing 1="1=1.79000, 10=1.54000, 100=1.26000, 500=1.12000, 1000=0.96000 (USD)", Radiation Hardening=No, Rds On Max=200mohm, REACH SVHC="No SVHC", Recovery Time=117ns, Rise Time=190ns, RoHS=Yes, RoHS Compliant=True, Series=HEXFET®, Stock 1=216, Supplier 1=Digikey, Termination="Through Hole", Turn-Off Delay Time=46ns, Turn-On Delay Time=17ns, Typical Rise Time=23ns, Voltage Rating (DC)=40V, Width=4.83mm
Q8 Q9: library part CMP-013-00017-4, "HEXFET(R) Power MOSFET, 100 V, 9.7 A, 0.2 Ohm, -55 to 175 degC, 3-Pin FM (TO-220AB), RoHS, Tube", Case/Package=TO-220-3, Input Capacitance=330pF, Manufacturer="International Rectifier", Max Operating Temperature=175°C, Min Operating Temperature=-55°C, Nominal Dual Supply Voltage=100V, Package Description="3-Pin Flange Mount, Body 4.445 x 10.415 mm, Pitch 2.54 mm", Package Quantity=50, Package Reference=TO-220AB, Power=48W, Datasheet URL=http://www.infineon.com/dgdl/irf520npbf.pdf?fileId=5546d462533600a4015355e340711985, Datasheet Version=Nov-03, Elements=1, Mounting Technology=TH, Nominal Vgs=4V, Packaging=Rail/Tube, Pins=3, Rds On Max=200mohm, RoHS Compliant=True, Typical Rise Time=23ns
R1 R2 R3 R4 R5 R6 R7 R8 R9 R10 R11 R12 R13 R14 R15 R16 R17 R18 R19 R20 R21 R22 R23 R24 R25 R26 R27 R28 R29 R30 R31 R32 R33 R34 R35 R36 R37 R38 R39 R40 R41 R42 R43 R44 R45 R46 R47: "Resistor", LatestRevisionDate=17-Jul-2002, LatestRevisionNote="Re-released for DXP Platform.", PackageDescription="Axial Device, Thru-Hole; 2 Leads; 0.3 in Pin Spacing", PackageReference=AXIAL-0.3, Published=8-Jun-2000, Publisher="Altium Limited"
U1: "Comparator Quad ±16V/32V 14-Pin SOP T/R", Manufacturer=Rohm, Manufacturer Part Number=LM339F-E2, Package=BGA-676, Supplier Part Number 1=LM339F-E2TR-ND, Temperature="-40°C ~ 85°C", Voltage="1.14 V ~ 1.26 V", Category=Comparators, CreatedBy="Samuel Mathieu", HelpURL=https://d1d2qsbl8m0m72.cloudfront.net/en/products/databook/datasheet/ic/amp_linear/comparator/lm393f-e.pdf, Mfg="Rohm Semiconductor", Mfg Part Number=LM339F-E2, Pricing 2="1=0.96000, 10=0.84900, 25=0.79720, 100=0.65060, 250=0.60432, 500=0.51432, 1000=0.41145 (USD)", RoHS=Yes, RoHS Compliant=Yes, Stock 2=2211, Supplier 1=Digikey, Supplier 2=Digi-Key, Supplier Part Number 2=LM339F-E2CT-ND
U2 U5: library part CMP-1310-00171-1, "Single Supply Quad Operational Amplifier, 3 to 32 V, 0 to 70 degC, 14-Pin SOIC, Pb-Free, Tape and Reel", Manufacturer="On Semiconductor", ComponentLink1Description="Manufacturer URL", ComponentLink1URL=http://www.onsemi.com/, ComponentLink2Description=Datasheet, ComponentLink2URL=http://www.onsemi.cn/pub_link/Collateral/LM324-D.PDF, ComponentLink3Description="Package Specification", ComponentLink3URL=http://www.onsemi.com/pub_link/Collateral/751A-03.PDF, DatasheetVersion="Rev. 25", Mounting Technology="Surface Mount", PackageDescription="14-Pin Small Outline Integrated Circuit, Body 8.65 x 3.9 mm, Pitch 1.27 mm", PackageReference=SOIC-14-751A-03, PackageVersion="Rev. K, 05/2011", Packing="Tape and Reel", PartNumber=LM324DR2G, RoHS=TRUE, VCC Max (V)=32, VCC Min (V)=3
U3 U6: library part CMP-1685-00007-2, "IC OSC SGL TIMER 100KHZ 8-SOIC", Case/Package=SOIC, Frequency=100kHz, High Level Output Current=-200mA, Low Level Output Current=200mA, Max Operating Temperature=70°C, Max Supply Voltage=16V, Min Operating Temperature=0°C, Min Supply Voltage=4.5V, Operating Supply Current=10mA, Package Quantity=2500, Quiescent Current=15mA, Contact Plating=Gold, Height=1.58mm, Lead Free="Lead Free", Length=4.9mm, Mount="Surface Mount", Number of Pins=8, Number of Timers/Counters=1, Packaging="Tape and Reel", Radiation Hardening=No, REACH SVHC="No SVHC", Weight=0.002561oz, Width=3.91mm
U4: library part "Dual JK flip-flop", "Flip Flop Element JK Type Bit Negative Edge 14-SOIC (0.154\", 3.90mm Width)"

## Nets (pads, with @x,y where several pads share a name; then routed paths per layer and width w, separated by ;. In a path a pad name is that pad's centre, name@x,y a point inside that pad or via, vN(x,y) a via of type N, cw(c..) or ccw(c..) an arc to the next point about the centre after c; other vN are vias at no path point)
5V: P2.5 P4.5 P13.35 P13.36 P14.35 P14.36 P16.2 P17.1
6V: C22.2 C23.2 C24.2 P19.2 R44.1
7V4: C10.2 C11.2 C12.2 P18.2 R39.1
24V: C8.1 C9.2 C20.1 C21.2
+5: C1.1 Q1.2 R1.1 R2.1 R5.2 R7.2 R9.2 R12.2 R17.2 R19.2 R20.2 R24.2 R29.2 R31.2 R32.2 R36.2 U1.3 U3.4 U3.8 U4.2 U4.4 U4.6 U6.4 U6.8
+12_Drive1: U2.11
+12_Drive2: U5.4 U5.11
ANTENNA_RX: P16.6
ANTENNA_TX: P16.5
ARD1_CS: P13.3
ARD1_D22: P13.34
ARD1_D23: P13.33
ARD1_D24: P13.32
ARD1_D25: P13.31
ARD1_D26: P13.30
ARD1_D27: P13.29
ARD1_D28: P13.28
ARD1_D29: P13.27
ARD1_D30: P13.26
ARD1_D31: P13.25
ARD1_D32: P13.24
ARD1_D33: P13.23
ARD1_D34: P13.22
ARD1_D35: P13.21
ARD1_D36: P13.20
ARD1_D37: P13.19
ARD1_D38: P13.18
ARD1_D39: P13.17
ARD1_D40: P13.16
ARD1_D41: P13.15
ARD1_D42: P13.14
ARD1_D43: P13.13
ARD1_D44: P13.12
ARD1_D45: P13.11
ARD1_MISO: P13.5
ARD1_MOSI: P13.6
ARD1_SCK: 
ARD1_SCL: P15.10 P17.3
ARD1_SDA: P1.2
ARD2_BMSDI: P12.5
ARD2_BMSEN: P8.6
ARD2_BMSRO: P12.6
Enable_Switching_1: Q5.3 R21.2 U4.1
Enable_Switching_2: Q7.3 R33.2 U4.5
GND: C1.2 C2.1 C3.2 C4.2 C5.1 C6.2 C7.1 C8.2 C9.1 C10.1 C11.1 C13.1 C14.1 C15.1 C17.1 C18.1 C19.1 C20.2 C21.1 C22.1 C23.1 C25.1 C26.1 C27.1 C29.1 C30.1 C31.1 P1.4 P2.6 P2.7 P3.4 P4.6 P4.7 P13.1 P13.2 P14.1 P14.2 P15.7 P16.1 P17.2 P18.3 P19.3 Q2.2 Q3.3 Q4.2 Q5.2 Q6.2 Q7.2 Q8.3 Q9.3 Q10.2 R8.1 R13.1 R15.1 R18.1 R26.1 R30.1 R38.2 R41.2 R42.2 R43.2 R46.2 R47.2 U1.12 U2.4 U3.1 U4.11 U6.1
NetC3_1: C3.1 Q1.3 R6.2 U1.7 U1.9
NetC4_1: C4.1 R16.2 U2.3 U2.5
NetC5_2: C5.2 R23.1 U3.2 U3.6
NetC6_1: C6.1 R28.2 U5.3 U5.5
NetC7_2: C7.2 R35.1 U6.2 U6.6
NetC12_1: C12.1
NetC13_2: C13.2
NetC14_2: C14.2
NetC15_2: C15.2 C16.2
NetC16_1: C16.1 R41.1
NetC17_2: C17.2 R40.1
NetC18_2: C18.2
NetC19_2: C19.2
NetC24_1: C24.1
NetC25_2: C25.2
NetC26_2: C26.2
NetC27_2: C27.2 C28.2
NetC28_1: C28.1 R46.1
NetC29_2: C29.2 R45.1
NetC30_2: C30.2
NetC31_2: C31.2
NetLabel1: 
NetLabel2: 
NetQ1_1: Q1.1 R3.2
NetQ2_1: Q2.1 R4.2
NetQ2_3: Q2.3 R2.2 R3.1
NetQ3_1: Q3.1 Q4.3 R10.1
NetQ4_1: Q4.1 R11.2
NetQ5_1: Q5.1 R22.2
NetQ6_1: Q6.1 R25.2
NetQ6_3: Q6.3 R24.1 U4.3
NetQ7_1: Q7.1 R34.2
NetQ8_1: Q8.1 U4.12
NetQ9_1: Q9.1 U4.9
NetQ10_1: Q10.1 R37.2
NetQ10_3: Q10.3 R36.1 U4.10
NetR5_1: R5.1 R6.1 U1.2
NetR7_1: R7.1 R8.2 U1.5
NetR9_1: R9.1 R11.1 U1.14
NetR12_1: R12.1 R13.2 U1.8
NetR14_1: R14.1 R15.2 U2.2
NetR17_1: R17.1 R18.2 U2.6
NetR19_1: R19.1 R23.2 U3.7
NetR20_1: R20.1 R21.1 U3.3
NetR26_2: R26.2 R27.1 U5.2
NetR29_1: R29.1 R30.2 U5.6
NetR31_1: R31.1 R35.2 U6.7
NetR32_1: R32.1 R33.1 U6.3
NetR38_1: R38.1
NetR39_2: R39.2 R42.1
NetR40_2: R40.2
NetR43_1: R43.1
NetR44_2: R44.2 R47.1
NetR45_2: R45.2
PWM_Déplacement1: R16.1
PWM_Déplacement2: R28.1
PWM_Soufflante: U1.4
R1_R2: Q8.2
R3_R4: Q9.2
Sens_Rotation1: R25.1 U4.14
Sens_Rotation2: R37.1 U4.7
SERVO_20: P19.1
SERVO_60: P18.1
SIGNAL_CONTACTEUR: Q3.2
SIGNAL_DRIVE: C2.2 U1.1 U1.6
Signal_Drive_1: R14.2 U2.1
Signal_Drive_2: R27.2 U5.1
Soufflante_MAXSPEED: R10.2
Soufflante_OFF: R1.2 R4.1
Switching_1_Ok: R22.1 U2.7
Switching_2_Ok: R34.1 U5.7
pads on no net: Conn_Arduino1. Conn_Arduino1.1 Conn_Arduino1.2 Conn_Arduino1.3 Conn_Arduino1.4 Conn_Arduino2. Conn_Arduino2.1 Conn_Arduino2.2 Conn_Arduino2.3 Conn_Arduino2.4 Conn_PI. Conn_PI.1 Conn_PI.2 Conn_PI.3 Conn_PI.4 J1.1 J1.2 J1.3 J1.4 J1.5 J1.6 J1.7 J1.8 J1.9 J1.10 J1.11 J2.1 J2.2 J2.3 J2.4 J2.5 J2.6 J2.7 J2.8 J2.9 J2.10 J2.11 P1.1 P1.3 P1.5 P1.6 P1.7 P1.8 P1.9 P1.10 P2.1 P2.2 P2.3 P2.4 P2.8 P3.1 P3.2 P3.3 P3.5 P3.6 P3.7 P3.8 P3.9 P3.10 P4.1 P4.2 P4.3 P4.4 P4.8 P5.1 P5.2 P5.3 P5.4 P5.5 P5.6 P5.7 P5.8 P6.1 P6.2 P6.3 P6.4 P6.5 P6.6 P6.7 P6.8 P7.1 P7.2 P7.3 P7.4 P7.5 P7.6 P7.7 P7.8 P8.1 P8.2 P8.3 P8.4 P8.5 P8.7 P8.8 P9.1 P9.2 P9.3 P9.4 P9.5 P9.6 P9.7 P9.8 P10.1 P10.2 P10.3 P10.4 P10.5 P10.6 P10.7 P10.8 P11.1 P11.2 P11.3 P11.4 P11.5 P11.6 P11.7 P11.8 P12.1 P12.2 P12.3 P12.4 P12.7 P12.8 P13.4 P13.7 P13.8 P13.9 P13.10 P14.3 P14.4 P14.5 P14.6 P14.7 P14.8 P14.9 P14.10 P14.11 P14.12 P14.13 P14.14 P14.15 P14.16 P14.17 P14.18 P14.19 P14.20 P14.21 P14.22 P14.23 P14.24 P14.25 P14.26 P14.27 P14.28 P14.29 P14.30 P14.31 P14.32 P14.33 P14.34 P15.1 P15.2 P15.3 P15.4 P15.5 P15.6 P15.8 P15.9 P16.3 P16.4 P16.7 P17.4 P17.5 P17.6 P17.7 P17.8 P17.9 P17.10 U1.10 U1.11 U1.13 U2.8 U2.9 U2.10 U2.12 U2.13 U2.14 U3.5 U4.8 U4.13 U5.8 U5.9 U5.10 U5.12 U5.13 U5.14 U6.5
copper on no net: | length 19957.1
  Top w5: 0,0 0,4950 cw(c50,4950) 50,5000 4950,5000 cw(c4950,4950) 5000,4950 5000,0 0,0

## Polygon pours and split planes (outlines as drawn)
no net on Ground Plane (split plane): 4954.69,4979.62 4959.27,4978.52 4963.62,4976.72 4967.63,4974.26 4971.21,4971.21 4974.26,4967.63 4976.72,4963.62 4978.52,4959.27 4979.62,4954.69 4979.95,4950.5 4979.9,4950 4979.9,20.1 20.1,20.1 20.1,4950 20.05,4950.5 20.38,4954.69 21.48,4959.27 23.28,4963.62 25.74,4967.63 28.79,4971.21 32.37,4974.26 36.38,4976.72 40.73,4978.52 45.31,4979.62 49.5,4979.95 50,4979.9 4950,4979.9 4950.5,4979.95
no net on Power Plane (split plane): 4954.69,4979.62 4959.27,4978.52 4963.62,4976.72 4967.63,4974.26 4971.21,4971.21 4974.26,4967.63 4976.72,4963.62 4978.52,4959.27 4979.62,4954.69 4979.95,4950.5 4979.9,4950 4979.9,20.1 20.1,20.1 20.1,4950 20.05,4950.5 20.38,4954.69 21.48,4959.27 23.28,4963.62 25.74,4967.63 28.79,4971.21 32.37,4974.26 36.38,4976.72 40.73,4978.52 45.31,4979.62 49.5,4979.95 50,4979.9 4950,4979.9 4950.5,4979.95

## Silkscreen, mask and mechanical layers (free items; w line width, h text height)
Top Overlay:
  rectangle: -1261.38,2160.75 -752.79,2464.02
  lines w5: -1520,3460 -1520,3700 -430,3700 -430,3460 -1520,3460
  text ".Project_Name" at -1928.77,3700 h78.74
  text ".Project_Global" at -1478.77,3480 h39.37
  text ".Project_Revision" at -1340,3306.31 h40
  text "Revision" at -1243.7,3306.31 h40
  text ".Project_DateCode" at -1310,3240 h40
  text "Designed by:" at -1266,3100 h36
  text ".Project_Designer1" at -1313.15,3050.76 h36
  text ".Project_Designer2" at -1313.15,2980.51 h36
  text ".Project_Designer3" at -1313.15,2910.25 h36
  text ".Project_Designer4" at -1313.15,2840 h36
  text "Serial #" at -1264.6,2447.17 h39.37

## Text inside footprints (layer, text, board x,y; h text height)
J1: Top Assembly "Board Edge" at 7795.83,4615.51 h23.62
J2: Top Assembly "Board Edge" at 7405.83,4615.51 h23.62
P13: Top Overlay "36" at 5390,3980 h50 r90; Top Overlay "35" at 5490,3980 h50 r90; Top Overlay "1" at 5490,2120 h50 r90; Top Overlay "2" at 5390,2100 h50 r90
P14: Top Overlay "36" at 5130,3980 h50 r90; Top Overlay "35" at 5230,3980 h50 r90; Top Overlay "1" at 5230,2120 h50 r90; Top Overlay "2" at 5130,2100 h50 r90